# Altium PCB A25_P1_SEPIC.PcbDoc
Units mil, origin at the board's own origin, x right, y up, seen from the top; angles counter-clockwise.
Board outline 6000 x 4000 mil, 2 copper layers (Top Layer, Bottom Layer); 29 components, 19 nets, 83 pads, 0 vias.
Unrouted connection lines stored in the file: 56.
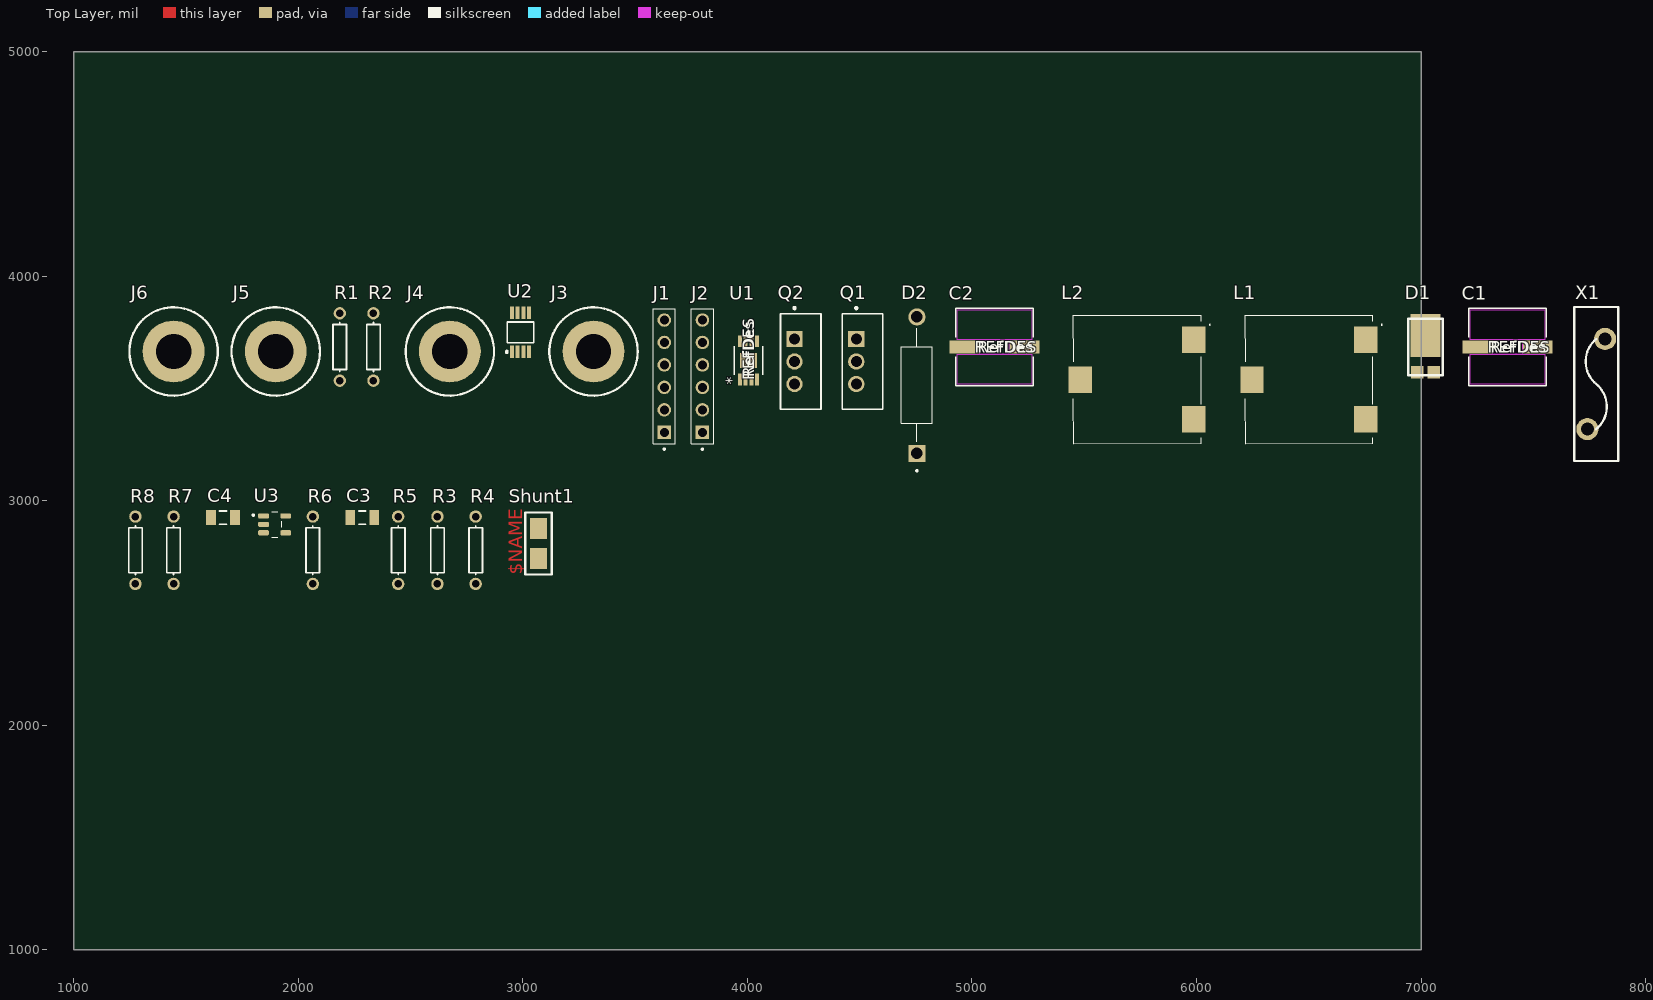
[diagram p0: Top Layer view]
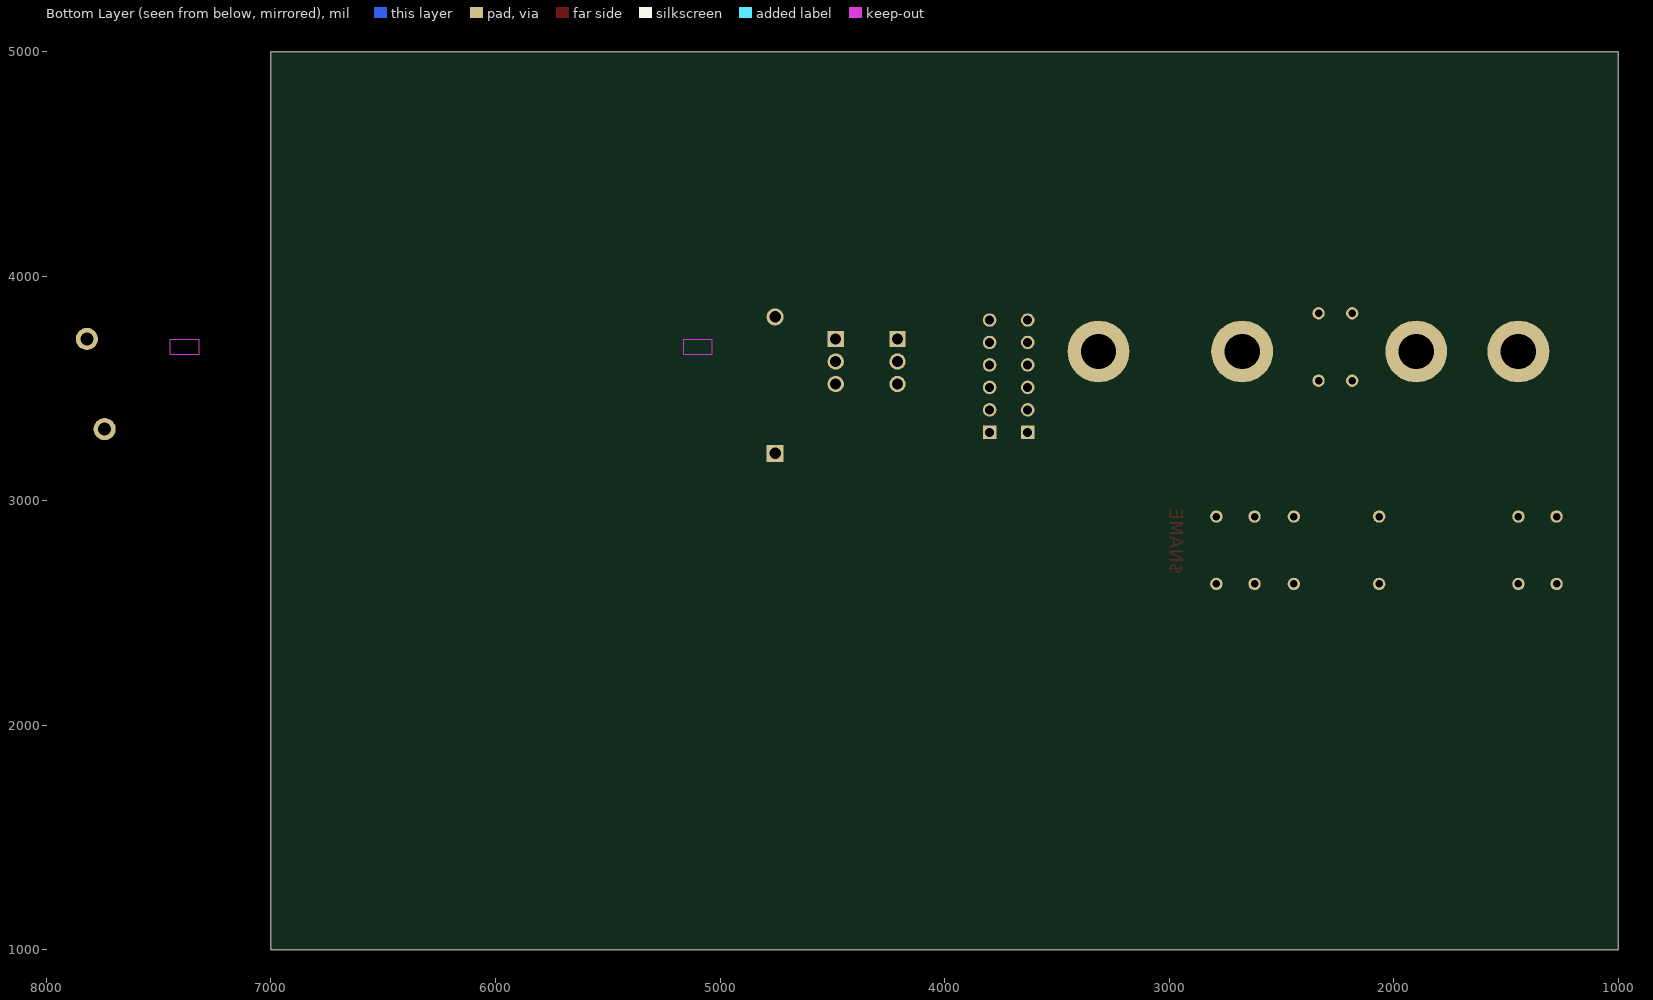
[diagram p1: Bottom Layer view, seen from below]

## Layer stack, top to bottom
Top Solder: solder mask 0.4, Solder Resist, Dk 3.5
Top Layer: signal copper 1.4
Dielectric 1: dielectric 12.6, FR-4, Dk 4.8
Bottom Layer: signal copper 1.4
Bottom Solder: solder mask 0.4, Solder Resist, Dk 3.5

## Board outline
1000,1000 7000,1000 7000,5000 1000,5000

## Design rules (kind name [scope] priority, off if disabled: settings)
Clearance [All] p1: gap=10 ignorepadtopadclearanceinfootprint=FALSE
PolygonConnect [All] p1: connectstyle=Relief reliefconductorwidth=10 reliefentries=4 polygonreliefangle="90 Angle" airgapwidth=10
RoutingVias [All] p1: holewidth=28 width=50 viastyle="Through Hole" minholewidth=28 minwidth=50 maxholewidth=28 maxwidth=50
SolderMaskExpansion [All] p1: expansion=4 istentingtop=FALSE
SupplyNets "Schematic Supply Nets_1" [InNet('+5')] p1: voltage=0.000
SupplyNets "Schematic Supply Nets" [InNet('GND')] p2: voltage=0.000
Width [All] p1: maxlimit=10 minlimit=10 preferedwidth=10
30 further rules are at their usual default settings.

## Classes and differential pairs
component class sepic_schem: C1 C2 D1 D2 J1 J2 J3 J4 J5 J6 L1 L2 Q1 Q2 R1 R2 U1 U2 X1
component class Current&Voltage-acq: C3 C4 R3 R4 R5 R6 R7 R8 Shunt1 U3

## Components (designator, comment, footprint, x,y, rotation, side; value= is the part's Value field where it differs from the comment)
C1 "150uF" CAP_A768_KEM 7385,3685 r0 top
C2 "150uF" CAP_A768_KEM 5100,3685 r0 top
C3 "Cap Semi" C1206 2285,2925 r0 top value=6n
C4 "Cap Semi" C1206 1665,2925 r0 top value=6n
D1 "SBR10E45P5-7" SBR10E45P5-7 7020,3685 r90 top
D2 "1N5360BG" DIOAD1543W101L863D368 4755,3515 r90 top
J1 "PH1-06-UA" ADAMTECH_PH1-06-UA 3630,3555 r90 top
J2 "PH1-06-UA" ADAMTECH_PH1-06-UA 3800,3555 r90 top
J3 "BananaConnector" banana_connector 3315,3665 r0 top
J4 "BananaConnector" banana_connector 2675,3665 r0 top
J5 "BananaConnector" banana_connector 1900,3665 r0 top
J6 "BananaConnector" banana_connector 1445,3665 r0 top
L1 "6.2uH" CDEP147NP6R1MC125 6500,3540 r0 top
L2 "6.2uH" CDEP147NP6R1MC125 5735,3540 r0 top
Q1 "IRFB7545" IFX-PG-TO220-3-904 4485,3620 r0 top
Q2 "IRFB7545" IFX-PG-TO220-3-904 4210,3620 r0 top
R1 "Res1" AXIAL-0.3 2185,3685 r90 top value=10k
R2 "Res1" AXIAL-0.3 2335,3685 r90 top value=10k
R3 "Res1" AXIAL-0.3 2620,2780 r90 top value=240k
R4 "Res1" AXIAL-0.3 2790,2780 r90 top value=10k
R5 "Res1" AXIAL-0.3 2445,2780 r90 top value=60k
R6 "Res1" AXIAL-0.3 2065,2780 r90 top value=10k
R7 "Res1" AXIAL-0.3 1445,2780 r90 top value=2.5M
R8 "Res1" AXIAL-0.3 1275,2780 r90 top value=1K
Shunt1 "1m" resistor_1206 3070,2810 r90 top
U1 "IX4340UE" IX4340UE_LTF 4005,3625 r90 top
U2 "MCP9808-E/MS" SOP65P490X110-8N 2990,3750 r90 top
U3 "LMV321AIDBVRG4" SOT95P280X145-5N 1895,2895 r0 top
X1 "MF-R500-2" MF-R500-2 7780,3520 r90 top

## Footprints (in the part's own frame and the unit in brackets; to place one, negate y for a bottom-side part, rotate by r counter-clockwise, add the part's x,y. Pads: shape width x height; smd on the part's side, far side on the other; paste and mask are expansions set on the pad)
ADAMTECH_PH1-06-UA [mm]
  rect 1.53x1.53 / inner round 1.53 / far side rect 1.53x1.53 hole 1.02: 1(-6.35,0)
  round 1.53 hole 1.02: 2(-3.81,0) 3(-1.27,0) 4(1.27,0) 5(3.81,0) 6(6.35,0)
  silkscreen extent -8.35,-1.25 7.62,1.25, body extent -7.62,-1.25 7.62,1.25, height 8.5
AXIAL-0.3 [mm] "Axial Device, Thru-Hole; 2 Leads; 0.3 in Pin Spacing"
  round 1.4 hole 0.85: 1(-3.81,0) 2(3.81,0)
  silkscreen extent -2.77,-0.76 2.77,0.76
banana_connector [mm]
  round 7 hole 4: 1(0,0)
  silkscreen extent -5,-5 5,5
C1206 [mm] "Chip Capacitor, Body 3.2x1.6mm, IPC High Density"
  rect 1.1x1.7 smd: 1(-1.35,0) 2(1.35,0)
  silkscreen extent -0.4,-0.75 0.4,0.75, body extent -1.7,-0.9 1.7,0.9, height 1.3
CAP_A768_KEM [mil]
  rect 134x59 smd paste+0 mask+0: 1(-134,0) 2(134,0)
  Top Layer keep-out region: -165.5,-165.5 -165.5,-31.5 165.5,-31.5 165.5,-165.5
  Top Layer keep-out region: -165.5,31.5 -165.5,165.5 165.5,165.5 165.5,31.5
  Top Layer keep-out region: -65,-31.5 -65,31.5 65,31.5 65,-31.5
  Keep-Out Layer region: -65,-31.5 -65,31.5 65,31.5 65,-31.5
  silkscreen extent -172,-172 172,172, body extent -181,-167 181,167, height 494
CDEP147NP6R1MC125 [mm]
  rect 2.65x3 smd: 1(6.425,4.5) 2(6.425,-4.5) 3(-6.425,0)
  silkscreen extent -7.25,-7.25 8.3,7.25, body extent -7.48,-7.25 7.48,7.25, height 0.9
DIOAD1543W101L863D368 [mm]
  rect 1.94x1.94 / inner round 1.94 / far side rect 1.94x1.94 hole 1.29: 1(-7.715,0)
  round 1.94 hole 1.29: 2(7.715,0)
  silkscreen extent -9.78,-1.75 6.43,1.75
IFX-PG-TO220-3-904 [mm] "TO,flange mount,2.54mm pitch;3 pin,4.45mm L X 10.66mm W X 19.15mm H body"
  rect 1.84x1.84 hole 1.24 paste-2539.97 mask+0: 1(0,2.54)
  round 1.84 hole 1.24 paste-2539.97 mask+0: 2(0,0) 3(0,-2.54)
  silkscreen extent -1.6,-5.4 3,6.17, body extent -1.53,-5.33 2.93,5.33, height 19.1
IX4340UE_LTF [mil]
  rect 51.5x17 smd paste+0 mask+0: 1(-84.75,38.39) 2(-84.75,12.8) 3(-84.75,-12.8) 4(-84.75,-38.39) 5(84.75,-38.39) 6(84.75,-12.8) 7(84.75,12.8) 8(84.75,38.39)
  rect 68x76 smd paste+0 mask+0: EPAD(0,0)
  silkscreen extent -64,-64 64,64, body extent -96,-59 96,59, height 43
MF-R500-2 [mm]
  round 2.5 hole 1.5: 1(-5.1,1) 2(5.1,-1)
  silkscreen extent -8.7,-2.5 8.7,2.5, body extent -8.7,-1.5 8.7,1.5, height 28.75
resistor_1206 [mm]
  rect 2.4x1.9 smd: 1(-1.7,0) 2(1.7,0)
  silkscreen extent -3.5,-1.5 3.5,1.5
SBR10E45P5-7 [mm]
  rect 1.4x1.4 smd: 1(-2.862,-0.92) 1(-2.862,0.92)
  rect 4.86x3.36 smd: 2(1.31,0)
  silkscreen extent -3.2,-1.95 3.2,1.95, body extent -3.25,-1.98 3.25,1.98, height 1.15
SOP65P490X110-8N [mm]
  rect 1.4x0.45 smd: 1(-2.2,0.975) 2(-2.2,0.325) 3(-2.2,-0.325) 4(-2.2,-0.975) 5(2.2,-0.975) 6(2.2,-0.325) 7(2.2,0.325) 8(2.2,0.975)
  silkscreen extent -2.39,-1.5 1.17,1.73, body extent -2.45,-1.5 2.45,1.5, height 1.1
SOT95P280X145-5N [mm]
  rrect50% 1.21x0.59 smd: 1(-1.255,0.95) 2(-1.255,0) 3(-1.255,-0.95) 4(1.255,-0.95) 5(1.255,0.95)
  silkscreen extent -2.51,-1.45 0.8,1.45, body extent -1.4,-1.45 1.4,1.45, height 1.45

## Part data
C1 C2: library part A768KS157M1GLAS025, "A768KS157M1GLAS025", Manufacturer_Name=Kemet, Copyright="Copyright (C) 2025 Ultra Librarian. All rights reserved.", Manufacturer_Part_Number=A768KS157M1GLAS025
C3 C4: "Capacitor (Semiconductor SIM Model)", LatestRevisionDate=29-May-2009, LatestRevisionNote="IPC-7351 Footprint Added.", PackageDescription="Chip Capacitor", PackageReference=C1206, Published=8-Jun-2000, Publisher="Altium Limited"
D1: "SBR10E45P5-7, low Vf 5W 10A", Package=None, Availability=Unavailable, MF="{'manufacturer': u'onsemi'}", MP=1N5360BG, Price=None
D2: Package=None, Availability=Unavailable, MF="{'manufacturer': u'onsemi'}", MP=1N5360BG, Price=None
J1 J2: "Pin Header 6P .100 Pitch Plug", Package=None, Check_prices=https://www.snapeda.com/parts/PH1-06-UA/Adam+Tech/view-part/?ref=eda, MF="Adam Tech", MP=PH1-06-UA, SnapEDA_Link=https://www.snapeda.com/parts/PH1-06-UA/Adam+Tech/view-part/?ref=snap
L1 L2: library part CDEP147NP-6R1MC-125, "Inductor", Manufacturer_Name=Sumida, Mouser Part Number=851-CDEP147P6R1MC125, Arrow Part Number=CDEP147NP-6R1MC-125, Arrow Price/Stock=https://www.arrow.com/en/products/cdep147np-6r1mc-125/sumida?utm_currency=USD&region=nac, Datasheet Link=https://products.sumida.com/products/pdf/CDEP147.pdf, Height=0.8mm, Manufacturer_Part_Number=CDEP147NP-6R1MC-125, Mouser Price/Stock=https://www.mouser.co.uk/ProductDetail/Sumida/CDEP147NP-6R1MC-125?qs=ttApTud31JaFBwCTy16d0g%3D%3D
Q1 Q2: "Insulated-Gate Field-Effect Transistor (IGFET), N-Channel, Enhancement, Body Diode, Pin 1 Gate, 2 Drain, 3 Source, 3 Pins", Manufacturer="Infineon Technologies", Manufacturer Order Number=IRFB7545, PackageReference=PG-TO220-3-904
R1 R2 R3 R4 R5 R6 R7 R8: "Resistor", LatestRevisionDate=17-Jul-2002, LatestRevisionNote="Re-released for DXP Platform.", PackageDescription="Axial Device, Thru-Hole; 2 Leads; 0.3 in Pin Spacing", PackageReference=AXIAL-0.3, Published=8-Jun-2000, Publisher="Altium Limited"
Shunt1: library part resistor
U1: "No Description Available", Manufacturer_Name="Littelfuse Inc", Copyright="Copyright (C) 2025 Ultra Librarian. All rights reserved.", Manufacturer_Part_Number=IX4340UE, RefDes=RefDes, Type=Type
U2: "Microchip MCP9808-E/MS Temperature Sensor 8-Pin MSOP, -40 - +125 degC", Package="MSOP-8 Microchip", Check_prices=https://www.snapeda.com/parts/MCP9808-E/MS/Microchip/view-part/?ref=eda, MF=Microchip, MP=MCP9808-E/MS, SnapEDA_Link=https://www.snapeda.com/parts/MCP9808-E/MS/Microchip/view-part/?ref=snap
U3: "Single Low-Voltage Rail-to-Rail Output Operational Amplifier see LMV321A for upgraded version 5-SOT-23 -40 to 125", Package="SOT-23-5 Texas Instruments", Check_prices=https://www.snapeda.com/parts/LMV321IDBVRG4/Texas+Instruments/view-part/?ref=eda, MF="Texas Instruments", MP=LMV321IDBVRG4, SnapEDA_Link=https://www.snapeda.com/parts/LMV321IDBVRG4/Texas+Instruments/view-part/?ref=snap

## Nets (pads, with @x,y where several pads share a name; then routed paths per layer and width w, separated by ;. In a path a pad name is that pad's centre, name@x,y a point inside that pad or via, vN(x,y) a via of type N, cw(c..) or ccw(c..) an arc to the next point about the centre after c; other vN are vias at no path point)
+5: J1.1 R1.2 R2.2 U2.8 U3.5
CurrentL_out: J2.1 R7.2 U3.1
GND: C2.1 C3.1 C4.1 D2.2 J1.6 L1.3 L2.1 L2.3 Q1.3 Q2.3 R5.2 R6.1 R8.2 Shunt1.2 U1.3 U1.EPAD U2.4 U2.5 U2.6 U2.7 U3.2
Hacheur_IN: Q1.1 U1.7
I_Sense_In: J6.1 Shunt1.1
NetC1_1: C1.1 L1.2 Q1.2
NetC1_2: C1.2 D1.1 L2.2
NetC4_2: C4.2 R6.2 U3.3
NetD2_1: D2.1 L1.1 Q2.1 X1.2
NetR3_2: R3.2 R4.1 R5.1
NetR7_1: R7.1 R8.1 U3.4
SCL: J1.2 R2.1 U2.2
SDA: J1.3 R1.1 U2.1
Sepic_Fet_input: J1.5 U1.2
Sepic_V+: C2.2 D1.2 J5.1 R3.1 U1.6
Source_GND: J4.1 Q2.2
Source_V+: J3.1 X1.1
Temp_Alert: J1.4 U2.3
VoltageL_out: C3.2 J2.3 R4.2
pads on no net: J2.2 J2.4 J2.5 J2.6 U1.1 U1.4 U1.5 U1.8

## Text inside footprints (layer, text, board x,y; h text height)
C1: Top Overlay "REFDES" at 7297.5,3660 h50; Top Overlay "RefDes" at 7310,3660 h50; Mechanical 13 "RefDes2" at 7297.5,3660 h50
C2: Top Overlay "REFDES" at 5012.5,3660 h50; Top Overlay "RefDes" at 5025,3660 h50; Mechanical 13 "RefDes2" at 5012.5,3660 h50
Shunt1: Top Layer "$NAME" at 2997.01,2670.39 h60 r90
U1: Top Overlay "RefDes" at 4030,3550 h50 r90; Top Overlay "*" at 3954.61,3517.75 h50 r90; Top Overlay "REFDES" at 4030,3537.5 h50 r90; Mechanical 13 "RefDes2" at 4030,3537.5 h50 r90; Mechanical 13 "*" at 3999,3568.5 h50 r90